# Altium PCB Candunio.PcbDoc
Units mm, origin at the board's own origin, x right, y up, seen from the top; angles counter-clockwise.
Board outline 46 x 46 mm, 2 copper layers (Top Layer, Bottom Layer); 35 components, 50 nets, 169 pads, 57 vias.
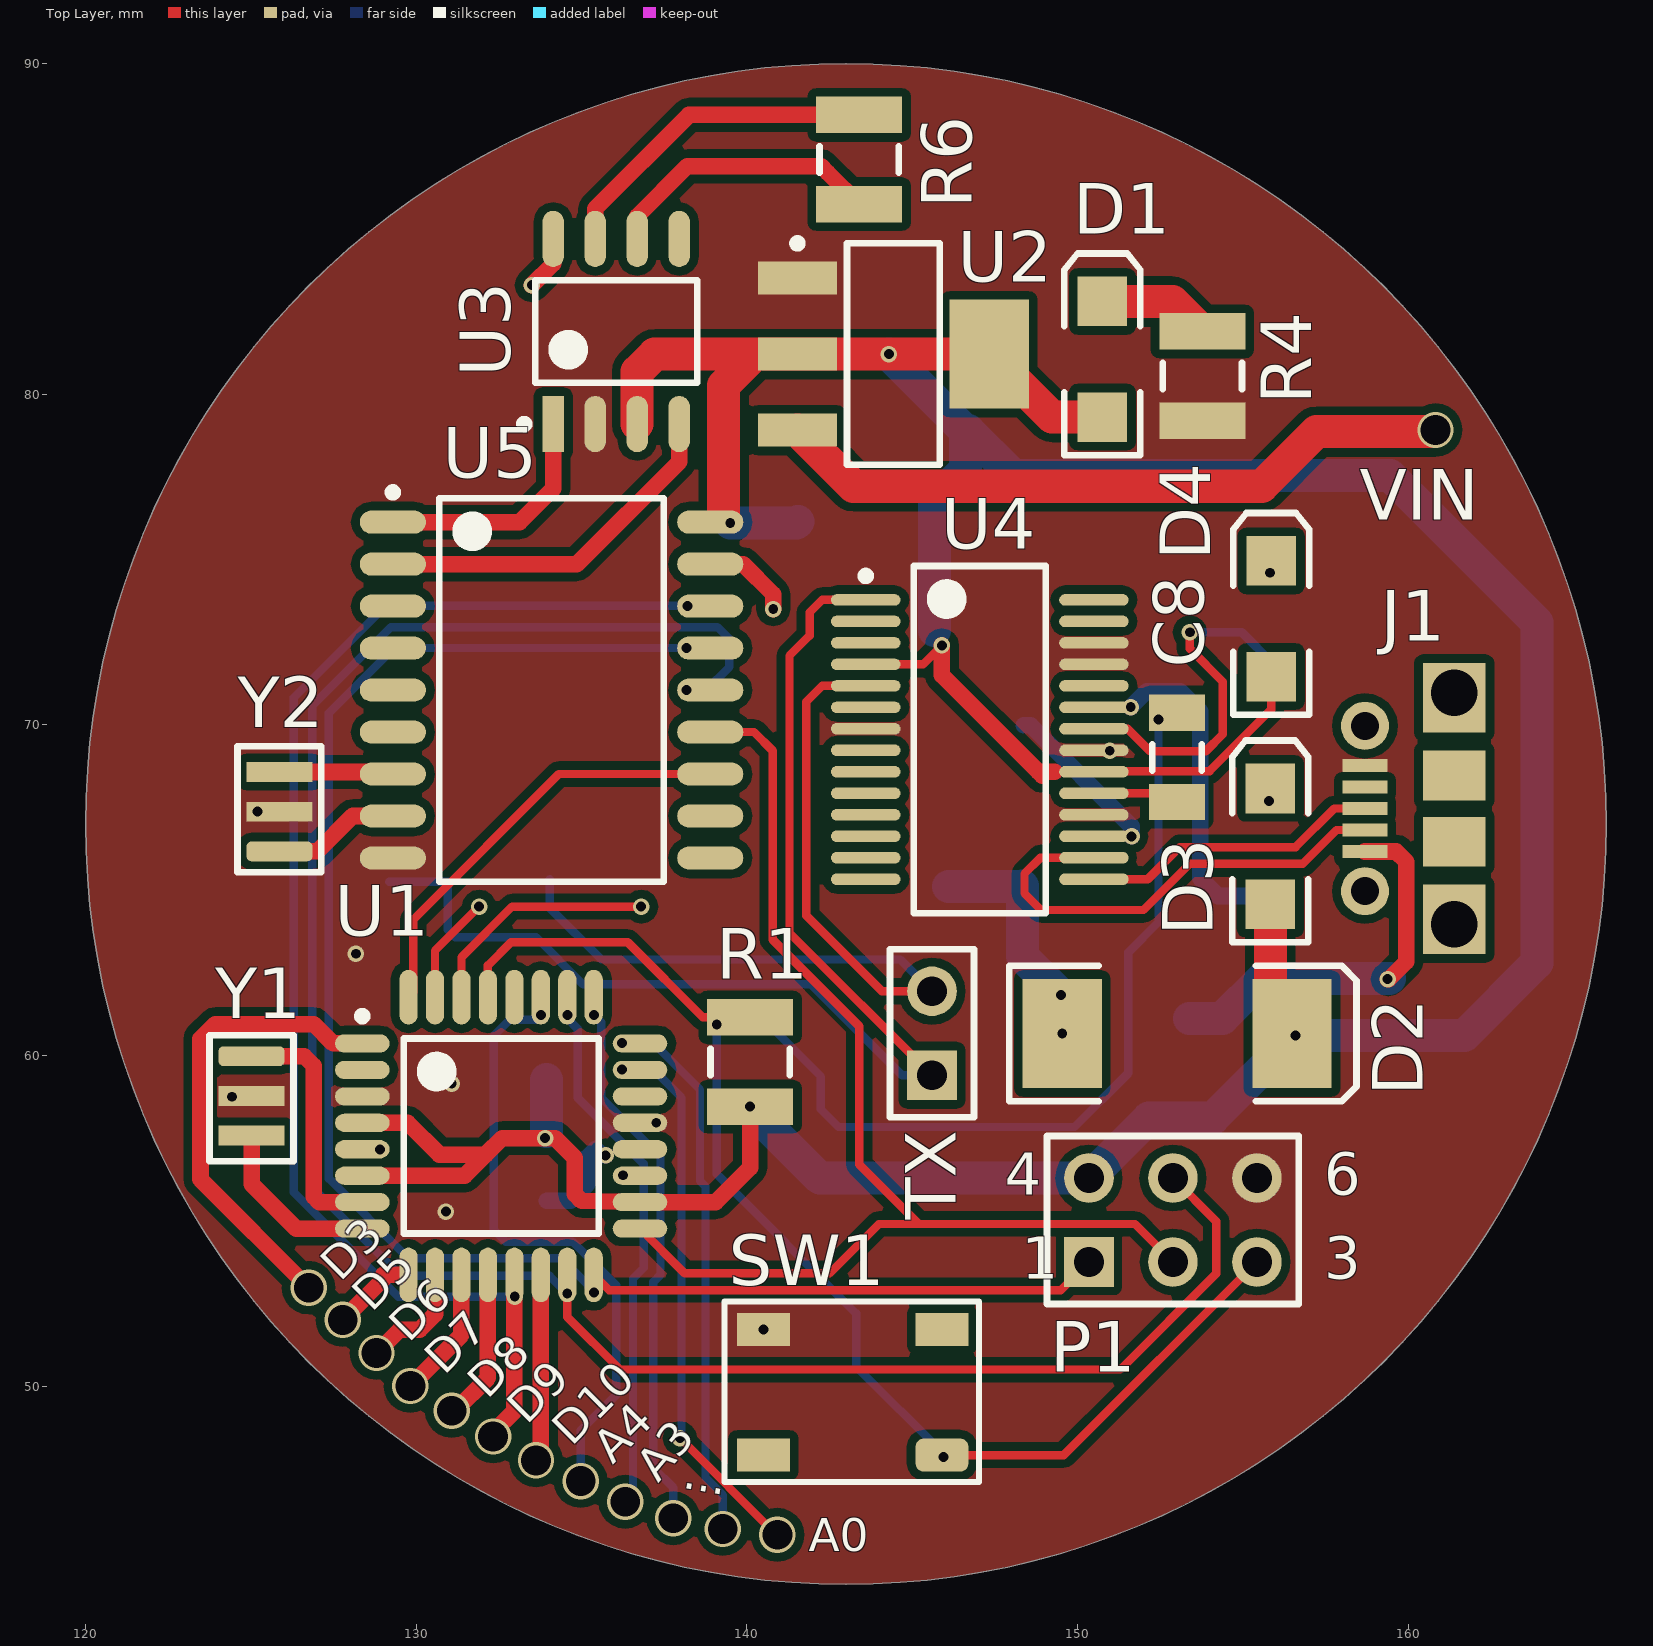
[diagram p0: Top Layer view]
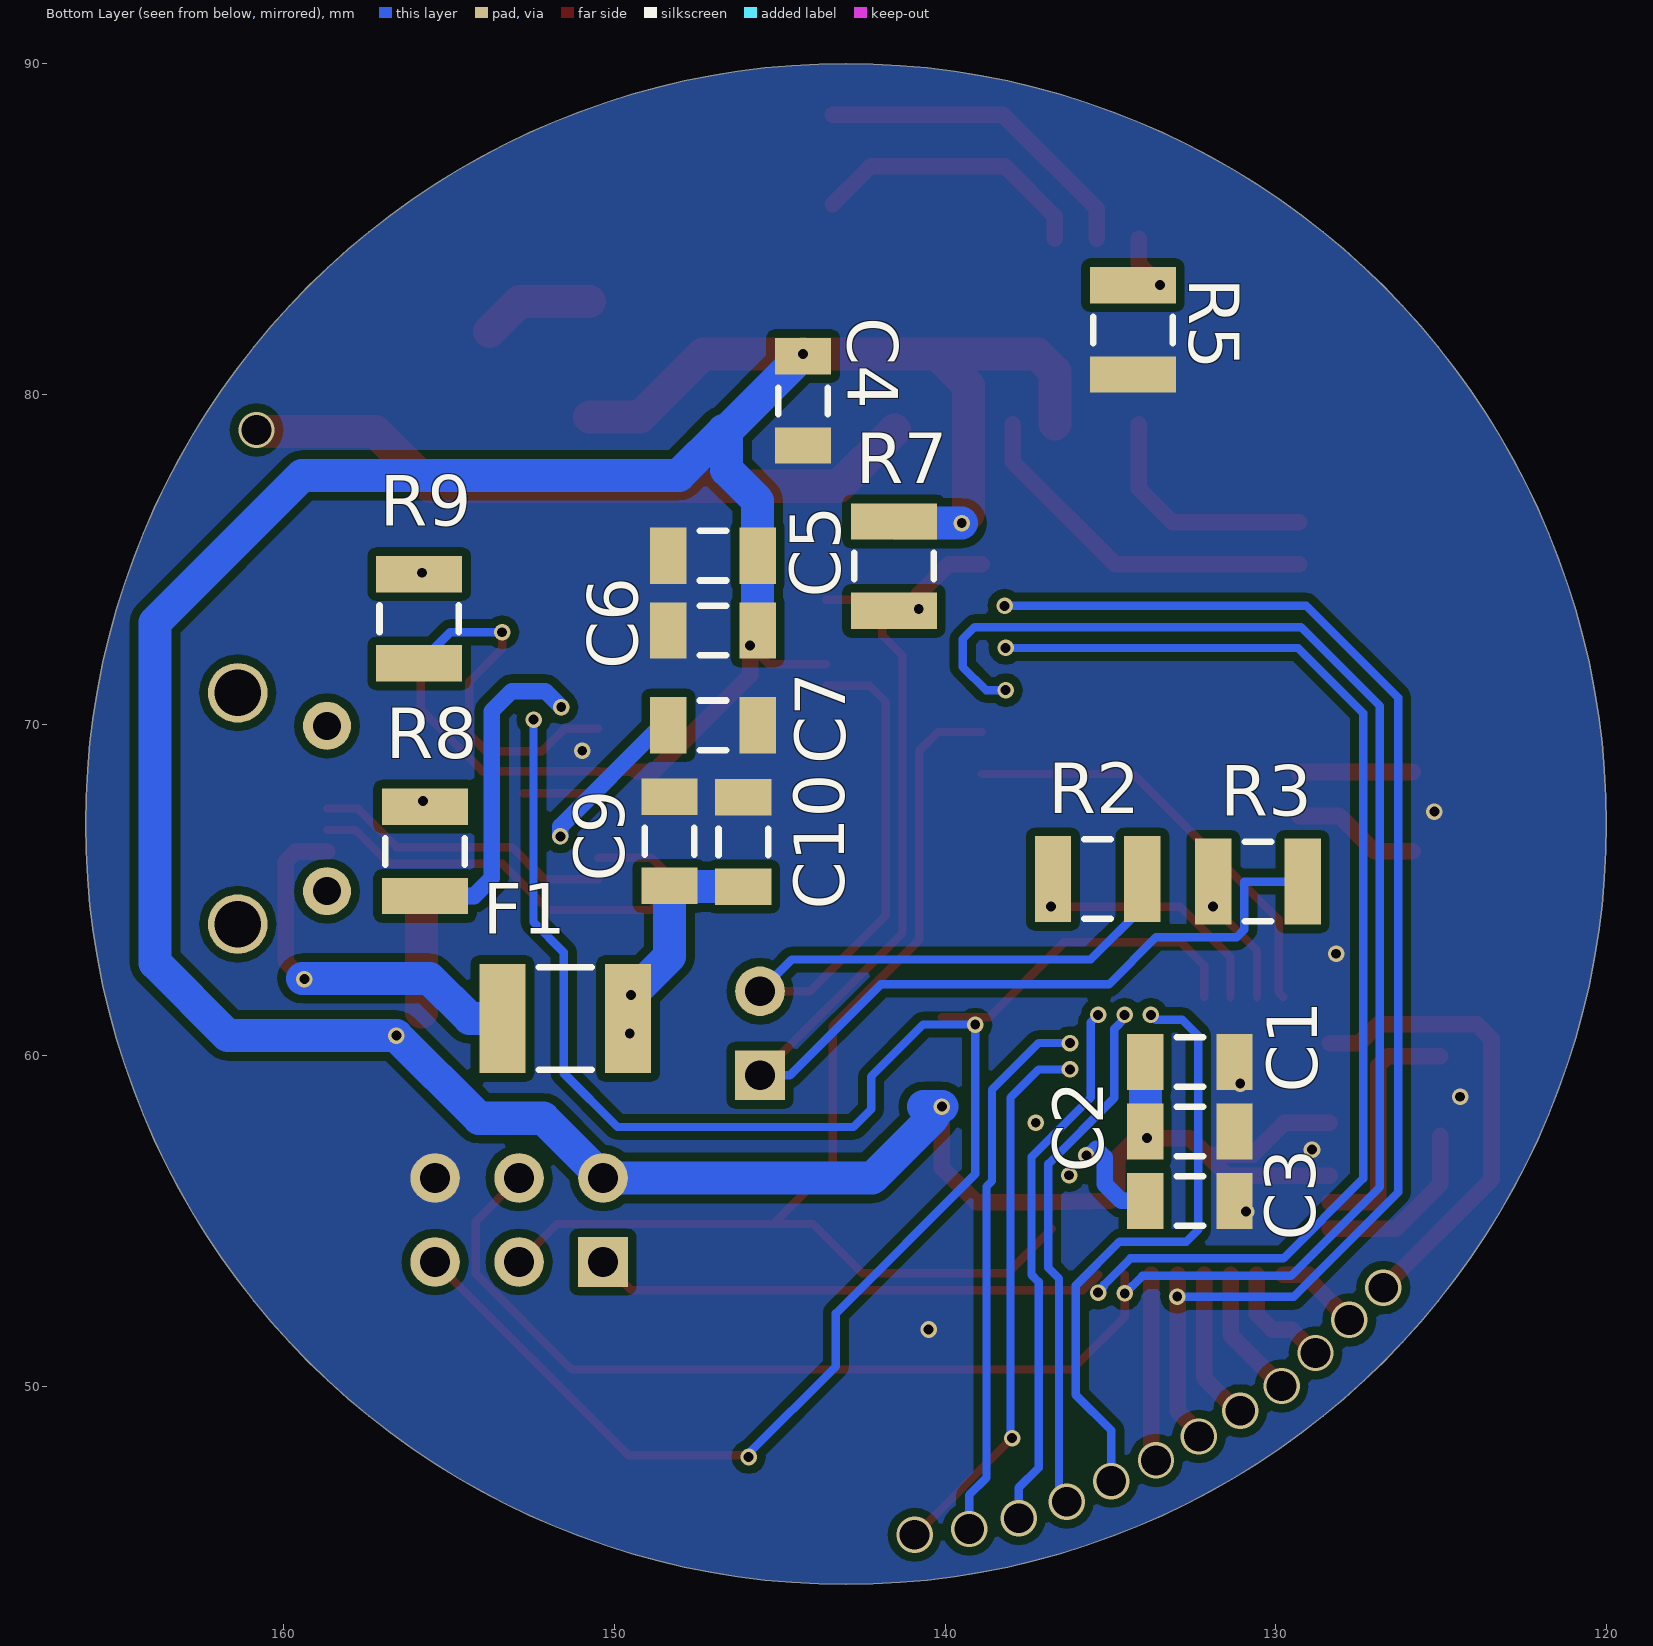
[diagram p1: Bottom Layer view, seen from below]

## Layer stack, top to bottom
Top Solder: solder mask 0.0102, Solder Resist, Dk 3.5
Top Layer: signal copper 0.0356
Dielectric 1: dielectric 0.32, FR-4, Dk 4.8
Bottom Layer: signal copper 0.0356
Bottom Solder: solder mask 0.0102, Solder Resist, Dk 3.5

## Board outline
120,67 cw(c143,67) 143,90 cw(c143,67) 166,67 cw(c143,67) 143,44 cw(c143,67) 120,67

## Design rules (kind name [scope] priority, off if disabled: settings)
Clearance [All] p1: gap=0.254 ignorepadtopadclearanceinfootprint=FALSE except(0: Arc-Hole Track-Hole SMDPad-Hole THPad-Hole Via-Hole Fill-Hole Poly-Hole Region-Hole Text-Hole; 0.249: SMDPad-SMDPad)
PlaneConnect [All] p1: planeconnectstyle=Direct reliefexpansion=0.508 reliefentries=4 reliefconductorwidth=0.254 reliefairgap=0.254
PolygonConnect [All] p1: connectstyle=Direct reliefconductorwidth=0.254 reliefentries=4 polygonreliefangle="90 Angle" airgapwidth=0.254
RoutingVias [All] p1: holewidth=0.3 width=0.5 viastyle="Through Hole" minholewidth=0.3 minwidth=0.5 maxholewidth=0.3 maxwidth=0.5 viatemplateguid#1={BD94946F-5F4F-4AE1-884C-F64635037A37} viatemplatename#1=v50h30
SolderMaskExpansion [All] p1: expansion=0.102
Width [All] p1: maxlimit=1 minlimit=0.254 preferedwidth=0.5
29 further rules are at their usual default settings.

## Components (designator, comment, footprint, x,y, rotation, side; value= is the part's Value field where it differs from the comment)
C1 "Cap Pol3" C1206 132.6,59.8 r180 bottom
C2 "Cap Semi" C1206 132.6,57.7 r180 bottom
C3 "Cap Semi" C1206 132.6,55.6 r180 bottom
C4 "Cap Semi" C1206 144.3,79.8 r270 bottom
C5 "Cap Pol3" C1206 147.022,75.116 r0 bottom
C6 "Cap Semi" C1206 147.022,72.855 r0 bottom
C7 "Cap Semi" C1206 147.022,69.985 r180 bottom
C8 "Cap Semi" C1206 153.016,69.017 r270 top
C9 "Cap Pol3" C1206 148.342,66.477 r90 bottom
C10 "Cap Semi" C1206 146.107,66.455 r90 bottom
D1 "LED2" 3.2X1.6X1.1 150.755,81.057 r90 top
D2 "Diode" SMC 153.016,60.661 r0 top
D3 "RED" 3.2X1.6X1.1 155.835,66.325 r90 top
D4 "GREEN" 3.2X1.6X1.1 155.861,73.208 r90 top
F1 "Fuse 2" 1812 151.492,61.118 r0 bottom
J1 "USB micro B" 1050170001 161.398,67.468 r90 top
P1 "ICSP" HDR2X3_CEN 150.349,53.752 r0 top
R1 "1K" 14-1210 140.1,59.8 r90 top
R2 "1K" 14-1210 135.388,65.334 r180 bottom
R3 "1K" 14-1210 130.537,65.258 r180 bottom
R4 "1K" 14-1210 153.778,80.549 r270 top
R5 "16.9K" 14-1210 134.322,81.946 r90 bottom
R6 "120" 14-1210 143.4,87.1 r270 top
R7 "10K" 14-1210 141.55,74.8 r90 bottom
R8 "1K" 14-1210 155.734,66.173 r90 bottom
R9 "1K" 14-1210 155.912,73.208 r90 bottom
SW1 "PTS525SM15SMTR2" PTS525SM15SMTR2 145.904,47.91 r180 top
TX "Serial" HDR1X2 145.6,59.4 r90 top (schematic designator P2)
U1 "ATmega328P-AU" 32A_N 132.569,57.562 r0 top
U2 "LM1117IMPX-5.0" MP04A_N 144.431,81.212 r0 top
U3 "MCP2551-E/SN" SOIC127P600X175-8M 136.049,81.898 r90 top
U4 "FT232RL-Reel" SSOP-28_N 147.047,69.553 r0 top
U5 "MCP2515-E/ST" SOIC127P1030X265-18M 134.093,71.052 r0 top
Y1 "CSTCE16M0V53-R0" CSTCE16M0V53-R0 125.019,59.976 r270 top
Y2 "CSTCE16M0V53-R0" CSTCE16M0V53-R0 125.863,66.173 r90 top

## Footprints (in the part's own frame and the unit in brackets; to place one, negate y for a bottom-side part, rotate by r counter-clockwise, add the part's x,y. Pads: shape width x height; smd on the part's side, far side on the other; paste and mask are expansions set on the pad)
3.2X1.6X1.1 [mm] "SMT LED; 2 Flat Leads"
  rect 1.5x1.5 smd: 1(-1.75,0) 2(1.75,0)
  silkscreen extent -2.9,-1.15 3.2,1.15
14-1210 [mm] "Chip Resistor, Body 3.2x2.5mm, IPC High Density"
  rect 1.1x2.6 smd: 1(-1.35,0) 2(1.35,0)
  silkscreen extent -0.4,-1.2 0.4,1.2, body extent -1.68,-1.32 1.68,1.32, height 0.9
32A_N [mm] "Thin QFP, 32-Leads, Body 7x7mm, Pitch 0.8mm, IPC Medium Density"
  oval 1.65x0.55 smd: 1(-4.2,2.8) 2(-4.2,2) 3(-4.2,1.2) 4(-4.2,0.4) 5(-4.2,-0.4) 6(-4.2,-1.2) 7(-4.2,-2) 8(-4.2,-2.8) 17(4.2,-2.8) 18(4.2,-2) 19(4.2,-1.2) 20(4.2,-0.4) 21(4.2,0.4) 22(4.2,1.2) 23(4.2,2) 24(4.2,2.8)
  oval 0.55x1.65 smd: 9(-2.8,-4.2) 10(-2,-4.2) 11(-1.2,-4.2) 12(-0.4,-4.2) 13(0.4,-4.2) 14(1.2,-4.2) 15(2,-4.2) 16(2.8,-4.2) 25(2.8,4.2) 26(2,4.2) 27(1.2,4.2) 28(0.4,4.2) 29(-0.4,4.2) 30(-1.2,4.2) 31(-2,4.2) 32(-2.8,4.2)
  silkscreen extent -4.32,-2.95 2.95,3.75, body extent -3.5,-3.5 3.5,3.5, height 1.2
1812 [mm] "Chip Capacitor, Body 4.5x3.2mm, IPC High Density"
  rect 1.4x3.3 smd: 1(-1.9,0) 2(1.9,0)
  silkscreen extent -0.8,-1.55 0.8,1.55, body extent -2.4,-1.7 2.4,1.7, height 1.4
1050170001 [mm] "CONN USB MICRO MOLEX MODIFIED FOR DRILL HITS"
  round 1.8 hole 1.4: 0(-3.5,0) 0(3.5,0)
  rect 2.1x1.9 smd: 0(-3.35,0) 0(3.35,0)
  round 1.45 hole 0.85: 0(-2.5,2.7) 0(2.5,2.7)
  rect 1.5x1.9 smd: 0(-1,0) 0(1,0)
  rect 0.4x1.35 smd: 1(-1.3,2.7) 2(-0.65,2.7) 3(0,2.7) 4(0.65,2.7) 5(1.3,2.7)
  body extent -4.1,-2.5 4.1,2.9, height 2.78
C1206 [mm] "Chip Capacitor, Body 3.2x1.6mm, IPC High Density"
  rect 1.1x1.7 smd: 1(-1.35,0) 2(1.35,0)
  silkscreen extent -0.4,-0.75 0.4,0.75, body extent -1.7,-0.9 1.7,0.9, height 1.3
CSTCE16M0V53-R0 [mm] "16MHz Resonator"
  rrect50% 0.6x2 smd: 1(0,0)
  rect 0.6x2 smd: 2(1.2,0) 3(2.4,0)
  silkscreen extent -0.64,-1.27 3.18,1.27
HDR1X2 [mm] "Connector; Header; 2 Position"
  rect 1.5x1.5 hole 0.9: 1(0,0)
  round 1.5 hole 0.9: 2(2.54,0)
  silkscreen extent -1.27,-1.27 3.81,1.27
HDR2X3_CEN [mm] "Connector; Header; 3x2 Position"
  rect 1.5x1.5 hole 0.9: 1(0,0)
  round 1.5 hole 0.9: 2(2.54,0) 3(5.08,0) 4(0,2.54) 5(2.54,2.54) 6(5.08,2.54)
  silkscreen extent -1.27,-1.27 6.35,3.81
MP04A_N [mm] "SOT223, 4-Leads, Body 6.5x3.5mm, Pitch 2.3mm, Lead Span 7mm, IPC Medium Density"
  rect 2.4x1 smd: 1(-2.9,2.3) 2(-2.9,0) 3(-2.9,-2.3)
  rect 2.4x3.3 smd: 4(2.9,0)
  silkscreen extent -3.02,-3.35 1.4,3.47, body extent -1.85,-3.35 1.85,3.35, height 1.8
PTS525SM15SMTR2 [mm] "Tact Switch"
  rrect50% 1.6x1 smd: 1(0,0)
  rect 1.6x1 smd: 2(5.4,0) 3(0,-3.8) 4(5.4,-3.8)
  silkscreen extent -1.12,-4.65 6.58,0.81
SMC [mm] "DO-214-AB/SMC; 2 C-Bend Leads; Body 7.9 x 5.9 mm, inc. leads (LxW)"
  rect 2.4x3.3 smd: 1(-3.475,0) 2(3.475,0)
  silkscreen extent -5.07,-2.05 5.43,2.05
SOIC127P600X175-8M [mm] "SOIC, 8-Leads, Body 4.90x3.90mm, Pitch 1.27mm, IPC Low Density"
  rect 1.7x0.65 smd: 1(-2.8,1.905)
  oval 1.7x0.65 smd: 2(-2.8,0.635) 3(-2.8,-0.635) 4(-2.8,-1.905) 5(2.8,-1.905) 6(2.8,-0.635) 7(2.8,0.635) 8(2.8,1.905)
  silkscreen extent -2.92,-2.45 1.55,2.9, body extent -1.95,-2.45 1.95,2.45, height 1.75
SOIC127P1030X265-18M [mm] "SOIC, 18-Leads, Body 11.50x7.50mm, Pitch 1.27mm, IPC Low Density"
  oval 2x0.7 smd: 1(-4.8,5.08) 2(-4.8,3.81) 3(-4.8,2.54) 4(-4.8,1.27) 5(-4.8,0) 6(-4.8,-1.27) 7(-4.8,-2.54) 8(-4.8,-3.81) 9(-4.8,-5.08) 10(4.8,-5.08) 11(4.8,-3.81) 12(4.8,-2.54) 13(4.8,-1.27) 14(4.8,0) 15(4.8,1.27) 16(4.8,2.54) 17(4.8,3.81) 18(4.8,5.08)
  silkscreen extent -4.92,-5.8 3.4,6.1, body extent -3.8,-5.8 3.8,5.8, height 2.65
SSOP-28_N [mm] "SOP, 28-Leads, Body 10.2x5.3mm, Pitch 0.65mm, IPC Medium Density"
  oval 2.1x0.35 smd: 1(-3.45,4.225) 2(-3.45,3.575) 3(-3.45,2.925) 4(-3.45,2.275) 5(-3.45,1.625) 6(-3.45,0.975) 7(-3.45,0.325) 8(-3.45,-0.325) 9(-3.45,-0.975) 10(-3.45,-1.625) 11(-3.45,-2.275) 12(-3.45,-2.925) 13(-3.45,-3.575) 14(-3.45,-4.225) 15(3.45,-4.225) 16(3.45,-3.575) 17(3.45,-2.925) 18(3.45,-2.275) 19(3.45,-1.625) 20(3.45,-0.975) 21(3.45,-0.325) 22(3.45,0.325) 23(3.45,0.975) 24(3.45,1.625) 25(3.45,2.275) 26(3.45,2.925) 27(3.45,3.575) 28(3.45,4.225)
  silkscreen extent -3.57,-5.25 2,5.25, body extent -2.8,-5.25 2.8,5.25, height 2

## Part data
C1 C5 C9: "Polarized Capacitor (Surface Mount)"
C2 C3 C4 C6 C7 C8 C10: "Capacitor (Semiconductor SIM Model)"
D1: "Typical RED, GREEN, YELLOW, AMBER GaAs LED"
D2: "Default Diode"
D3 D4: library part LED2, "Typical RED, GREEN, YELLOW, AMBER GaAs LED"
F1: "Fuse"
J1: library part 1050170001, "CONN SM TH USB MICRO MODIFIED FOR DRILL"
P1: library part "Header 3X2A", "Header, 3-Pin, Dual row"
R1 R2 R3 R4 R5 R6 R7 R8 R9: library part Res1, "Resistor"
TX: library part "Header 2", "Header, 2-Pin"
U1: "8-bit AVR Microcontroller, 32KB Flash, 1KB EEPROM, 2KB SRAM, 32-pin TQFP, Industrial Grade (-40°C to 85°C)"
U2: "800mA Low-Dropout Linear Regulator, 4-pin SOT-223"
U3 U5: "SOIC"
U4: "USB UART Asynchronous Serial Data Transfer Chip, SSOP-28, Tape and Reel"

## Via types
v1: diameter 0.5, hole 0.3, Top Layer to Bottom Layer, 44 vias
v2: diameter 1.1, hole 0.9, Top Layer to Bottom Layer, 13 vias

## Nets (pads, with @x,y where several pads share a name; then routed paths per layer and width w, separated by ;. In a path a pad name is that pad's centre, name@x,y a point inside that pad or via, vN(x,y) a via of type N, cw(c..) or ccw(c..) an arc to the next point about the centre after c; other vN are vias at no path point)
+3.3V: C7.1 U4.17 | length 4.8
  Bottom Layer w0.5: C7.1 148.582,69.985 151.638,66.929 v1(151.638,66.624)
+5V: C1.1 C2.1 C4.1 C5.1 C6.1 D1.1 D2.2 D3.1 D4.1 P1.4 R1.1 R7.2 U1.4 U1.6 U1.18 U2.2 U2.4 U3.3 U4.4 U4.20 U5.18 | length 133.4
  Top Layer w0.254: U4.4 145.328,71.828 v1(145.9,72.4) ; 149.312,68.578 U4.20 150.497,68.598 153.998,68.598 155.861,70.461 D4.1
  Top Layer w0.5: U1.6 131.462,56.362 132.1,57 ; U1.4 129.738,57.962 130.7,57 132.1,57 ; v1(140.1,58.45) 140.1,56.6 139.062,55.562 U1.18 135,55.6 134.8,55.8 134.8,56.9 134.2,57.5 v1(133.9,57.5) 132.6,57.5 132.1,57 ; v1(145.9,72.4) 145.9,71.5 148.822,68.578 ; 148.943,68.457 148.822,68.578 ; 149.312,68.578 148.822,68.578
  Top Layer w1: U3.3 136.684,80.684 137.212,81.212 140.245,81.212 ; U5.18@139.3,76.399 139.3,80.267 140.245,81.212 ; D1.1 149.236,79.307 U2.4 v1(144.3,81.212) U2.2 140.245,81.212 ; D2.2@155.835,61.316 D3.1
  Bottom Layer w0.254: C6.1@145.672,72.472 C6.1
  Bottom Layer w1: C2.1@133.944,57.7 C1.1@133.944,59.264 ; v1(139.5,76.1) 141.5,76.1 R7.2 ; v1(140.1,58.45) 140.65,58.45 140.35,58.15 142.208,56.292 P1.4 152.157,58.1 154.1,58.1 v1(156.6,60.6) 161.7,60.6 163.9,62.8 163.9,73.1 159.454,77.546 148.054,77.546 146.7,78.9 146.612,78.9 ; v1(144.3,81.212) 146.612,78.9 ; C6.1 C5.1 145.672,76.772 146.612,77.712 146.612,78.9
+12V: U2.3 | length 20.7
  Top Layer w1: U2.3 143.227,77.216 155.575,77.216 157.226,78.867 160.782,78.867 v2(160.833,78.918)
ADC0: U1.23 | length 16.6
  Top Layer w0.254: v1(137.975,48.425) 140.9,45.5 v2(140.925,45.5)
  Bottom Layer w0.254: v1(136.225,59.575) 137.175,59.575 138.025,58.725 138.025,48.475 v1(137.975,48.425)
ADC1: U1.24 | length 16.5
  Bottom Layer w0.254: v1(136.225,60.375) 137.175,60.375 138.582,58.968 138.582,56.203 138.75,56.035 138.75,47.225 139.275,46.7 v2(139.275,45.675)
ADC2: U1.25 | length 16.4
  Bottom Layer w0.254: v1(135.375,61.225) 135.594,61.006 135.594,58.726 137.389,56.931 137.389,53.365 137.175,53.151 137.175,47.525 137.775,46.925 v2(137.775,46)
ADC3: U1.26 | length 15.9
  Bottom Layer w0.254: v1(134.575,61.225) 134.575,61.114 134.881,60.808 134.881,58.721 136.881,56.721 136.881,53.576 136.558,53.253 136.558,46.733 v2(136.325,46.5)
ADC4: U1.27 | length 18.3
  Bottom Layer w0.254: v1(133.775,61.225) 133.625,61.075 132.825,61.075 132.35,60.6 132.35,54.725 132.706,54.369 134.723,54.369 136.05,53.042 136.05,49.733 134.975,48.658 v2(134.975,47.125)
ADC5: U1.28
ADC6: U1.19
  other v1: 136.25,56.375
ADC7: U1.22
CANH: R6.1 U3.7 | length 10.1
  Top Layer w0.5: U3.7 135.414,85.614 138.25,88.45 R6.1
CANL: R6.2 U3.6 | length 8.5
  Top Layer w0.5: U3.6 136.684,85.384 138.2,86.9 142.25,86.9 142.45,86.7 R6.2
D0: R2.1 U1.30 | length 7.3
  Top Layer w0.254: U1.30 131.369,62.969 132.9,64.5 v1(136.8,64.5)
D1: R3.1 U1.31 | length 3.3
  Top Layer w0.254: U1.31 130.569,63.169 v1(131.9,64.5)
D2/INTCAN: U1.32 U5.12 | length 13.2
  Top Layer w0.254: U1.32 129.913,61.906 129.913,64.113 134.312,68.512 U5.12
D3: U1.1 | length 14.2
  Top Layer w0.5: v2(126.75,52.975) 123.475,56.25 123.475,60.5 123.925,60.95 126.9,60.95 127.488,60.362 U1.1
D4: U1.2
D5: U1.9 | length 2.6
  Top Layer w0.5: v2(127.775,52) 129.004,53.229 129.004,53.362 U1.9
D6: U1.10 | length 3.4
  Top Layer w0.5: v2(128.8,51) 129.5,51.7 130.1,51.7 130.569,52.169 U1.10
D7: U1.11 | length 4
  Top Layer w0.5: v2(129.825,50) 131.369,51.544 U1.11
D8: U1.12 | length 4.6
  Top Layer w0.5: v2(131.075,49.25) 131.175,49.25 132.169,50.244 U1.12
D9/CS: U1.13 U5.16 | length 41.2
  Top Layer w0.5: v2(132.325,48.475) 132.325,48.6 132.969,49.244 U1.13
  Bottom Layer w0.254: v1(132.981,52.703) 129.454,52.703 126.3,55.857 126.3,70.826 129.074,73.6 v1(138.2,73.6)
D10: U1.14 | length 5.7
  Top Layer w0.5: v2(133.625,47.75) 133.769,47.894 U1.14
D11/MOSI: P1.5 U1.15 U5.14 | length 66
  Top Layer w0.254: U1.15 v1(134.569,52.8) 134.569,52.089 136.158,50.5 151.3,50.5 154.2,53.4 154.2,54.981 P1.5
  Bottom Layer w0.254: v1(134.569,52.8) 134.035,53.334 129.541,53.334 126.85,56.025 126.85,70.568 129.238,72.956 139.109,72.956 139.471,72.593 139.471,71.755 138.766,71.05 v1(138.175,71.05)
D12/MISO: P1.1 U1.16 U5.15 | length 50.7
  Top Layer w0.254: U1.16 135.831,52.9 149.497,52.9 P1.1
  Bottom Layer w0.254: v1(135.375,52.825) 135.2,53 135.2,53.061 134.4,53.861 129.771,53.861 127.358,56.274 127.358,70.358 129.325,72.325 v1(138.175,72.325)
D13/SCK: P1.2 U1.17 U5.13 | length 36
  Top Layer w0.254: U1.17 138.123,53.408 142.5,53.408 143.992,54.9 145.2,54.9 ; U5.13 140.218,69.782 140.784,69.216 140.784,63.498 143.4,60.882 143.4,56.7 145.2,54.9 ; P1.2 151.741,54.9 145.2,54.9
GND: C1.2 C2.2 C3.2 C4.2 C5.2 C6.2 C7.2 C9.2 C10.2 J1.5 P1.6 R4.2 R5.1 SW1.4 U1.3 U1.5 U1.21 U2.1 U3.2 U4.7 U4.18 U4.21 U4.25 U4.26 U5.9 Y1.2 Y2.2
  other v1: 140.504,51.71 130.9,55.275 128.905,57.15 137.262,57.963 124.425,58.75 131.075,59.15 128.175,63.075 125.2,67.375 150.978,69.215
NetC3_1: C3.1 U1.20 | length 3
  Bottom Layer w0.5: C3.1 134.67,55.6 135.179,56.109 135.179,56.921 135.433,57.175 135.63,56.978 v1(135.732,56.978)
NetC8_2: C8.2 U4.19 | length 2.3
  Top Layer w0.254: U4.19 C8.2@152.755,67.928
NetD1_2: D1.2 R4.1 | length 3.4
  Top Layer w1: D1.2 152.87,82.807 R4.1
NetD3_2: D3.2 R8.2
  other v1: 155.8,67.7
NetD4_2: D4.2 R9.2
  other v1: 155.825,74.6
NetF1_2: F1.2 J1.1 | length 11.7
  Top Layer w0.5: J1.1 159.638,66.168 159.944,65.862 159.944,62.834 159.416,62.306 v1(159.385,62.306)
  Bottom Layer w1: F1.2 154.387,61.118 155.6,62.332 v1@159.436,62.332
NetR5_2: R5.2 U3.8 | length 1.7
  Top Layer w0.5: v1(133.5,83.3) 134.144,83.944 U3.8
NetR7_1: R7.1 U5.17 | length 2.7
  Top Layer w0.5: U5.17 139.888,74.862 140.8,73.95 v1(140.8,73.5)
NetR8_1: R8.1 U4.23 | length 9.8
  Bottom Layer w0.5: v1(151.613,70.536) 152.095,71.018 153.111,71.018 153.721,70.409 153.721,65.354 154.252,64.823 R8.1
NetR9_1: R9.1 U4.22 | length 10.7
  Top Layer w0.254: U4.22 151.522,69.878 152.2,69.2 153.882,69.2 154.4,69.718 154.4,71.3 153.4,72.3 v1@153.4,72.7
  Bottom Layer w0.254: v1(153.4,72.8) 154.97,72.8 R9.1
NetU1_7: U1.7 Y1.1 | length 7.5
  Top Layer w0.5: Y1.1 126.613,59.976 126.898,59.69 126.898,55.728 127.064,55.562 U1.7
NetU1_8: U1.8 Y1.3 | length 5.4
  Top Layer w0.5: Y1.3 125.019,56.109 126.365,54.762 U1.8
NetU3_1: U3.1 U5.1 | length 7.4
  Top Layer w0.254: U3.1@134,78.954 U3.1
  Top Layer w0.5: U5.1 133.132,76.132 134.144,77.144 U3.1
NetU3_4: U3.4 U5.2 | length 11.1
  Top Layer w0.5: U5.2 134.862,74.862 137.954,77.954 U3.4
NetU5_7: U5.7 Y2.3 | length 3.5
  Top Layer w0.5: Y2.3 129.232,68.573 U5.7
NetU5_8: U5.8 Y2.1 | length 3.9
  Top Layer w0.5: Y2.1 127.006,66.173 128.075,67.242 U5.8
RESET: C8.1 P1.3 R1.2 SW1.1 U1.29 | length 64
  Top Layer w0.254: U1.29 132.169,62.725 132.867,63.424 136.398,63.424 138.672,61.15 R1.2 ; SW1.1 149.587,47.91 P1.3
  Bottom Layer w0.254: v1(145.948,47.854) 145.948,47.955 143.307,50.597 143.307,52.197 139.09,56.413 v1(139.09,60.935) 140.665,60.935 142.24,59.36 142.24,58.369 142.773,57.836 149.911,57.836 151.536,59.461 151.536,63.119 152.451,64.033 v1(152.451,70.155)
RXD: R2.2 TX.2 U4.5 | length 27.2
  Top Layer w0.254: U4.5 142.278,71.178 141.8,70.7 141.8,64.224 144.084,61.94 TX.2 TX.2@146.06,61.94
  Bottom Layer w0.254: R2.2 134.038,64.462 135.6,62.9 144.64,62.9 TX.2
TXD: R3.2 TX.1 U4.1 | length 37.6
  Top Layer w0.254: U4.1 142.278,73.778 141.9,73.4 141.9,72.7 141.292,72.092 141.292,63.708 TX.1
  Bottom Layer w0.254: R3.2 130.956,65.258 130.956,63.8 131.179,63.577 133.623,63.577 135.05,62.15 141.95,62.15 144.7,59.4 TX.1
USBD+: J1.3 U4.15 | length 9.1
  Top Layer w0.254: U4.15 152.128,65.328 153.1,66.3 156.6,66.3 157.768,67.468 J1.3
USBD-: J1.2 U4.16 | length 14.4
  Top Layer w0.254: U4.16 148.878,65.978 148.4,65.5 148.4,64.9 148.9,64.4 152,64.4 153.392,65.792 156.81,65.792 157.836,66.818 J1.2
VUSB: C9.1 C10.1 D2.1 F1.1 | length 7.2
  Bottom Layer w1: C10.1 148.32,65.105 C9.1 148.342,62.986 v1(149.504,61.824) 149.504,60.697 v1(149.541,60.661)
pads on no net: J1.0 J1.4 SW1.2 SW1.3 U3.5 U4.2 U4.3 U4.6 U4.8 U4.9 U4.10 U4.11 U4.12 U4.13 U4.14 U4.24 U4.27 U4.28 U5.3 U5.4 U5.5 U5.6 U5.10 U5.11

## Polygon pours and split planes (outlines as drawn)
GND on Bottom Layer "Bottom Layer-GND" (solid, pour order 1): 120,67 cw(c143,67) 143,90 cw(c143,67) 166,67 cw(c143,67) 143,44 cw(c143,67) 120,67
GND on Top Layer "Top Layer-GND" (solid, pour order 0): 120,67 cw(c143,67) 143,90 cw(c143,67) 166,67 cw(c143,67) 143,44 cw(c143,67) 120,67

## Silkscreen, mask and mechanical layers (free items; w line width, h text height)
Top Overlay:
  text "VIN" at 158.547,76.2 h1.52
  text "D3" at 127.7,53.125 h1 r45
  text "D5" at 128.65,52.2 h1 r45
  text "D6" at 129.775,51.275 h1 r45
  text "D7" at 130.85,50.3 h1 r45
  text "D8" at 132.15,49.575 h1 r45
  text "D9" at 133.35,48.8 h1 r45
  text "D10" at 134.7,48.15 h1 r45
  text "A4" at 135.95,47.6 h1 r45
  text "A3" at 137.325,47.05 h1 r50
  text "..." at 138.025,46.925 h1 r350
  text "A0" at 141.875,45 h1

## Text inside footprints (layer, text, board x,y; h text height)
P1: Top Overlay "4" at 147.809,55.784 h1.27; Top Overlay "1" at 148.317,53.244 h1.27; Top Overlay "3" at 157.461,53.244 h1.27; Top Overlay "6" at 157.461,55.784 h1.27